# Altium PCB PekeeCarte1.PcbDoc
Units mil, origin at the board's own origin, x right, y up, seen from the top; angles counter-clockwise.
Board outline 2330.03 x 1470.03 mil, 2 copper layers (Top Layer, Bottom Layer); 8 components, 12 nets, 116 pads, 0 vias.
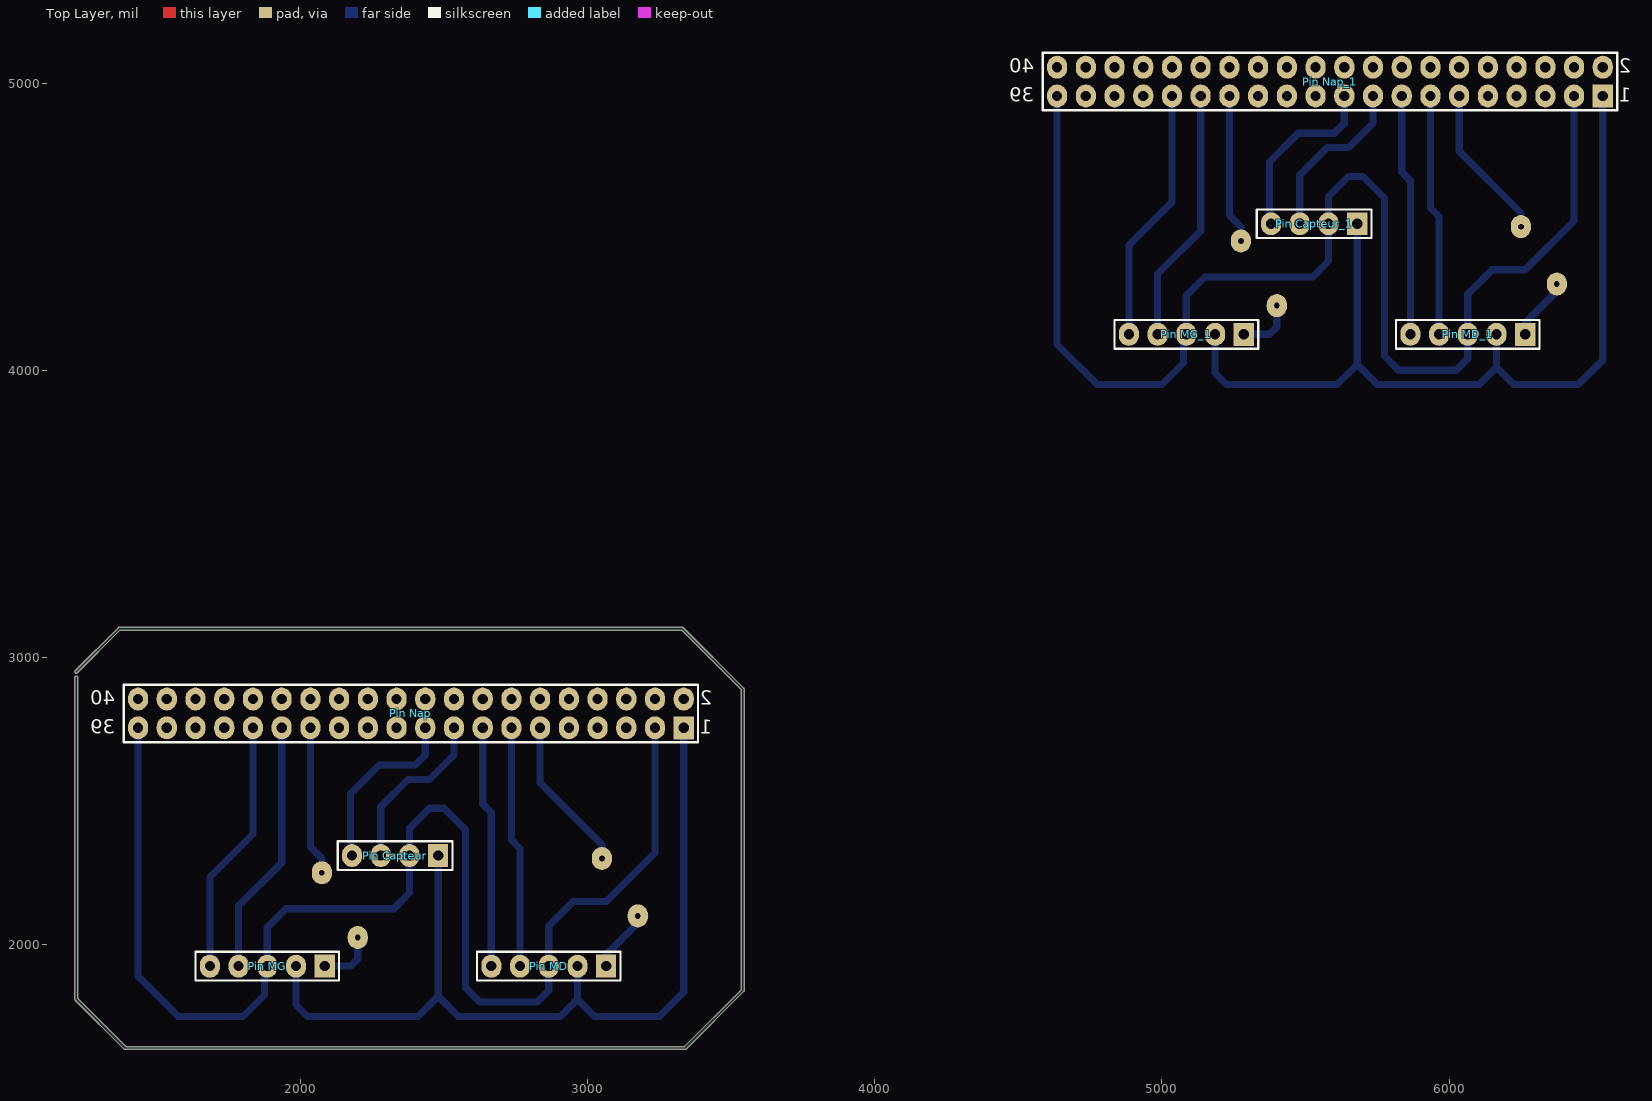
[diagram p0: Top Layer view]
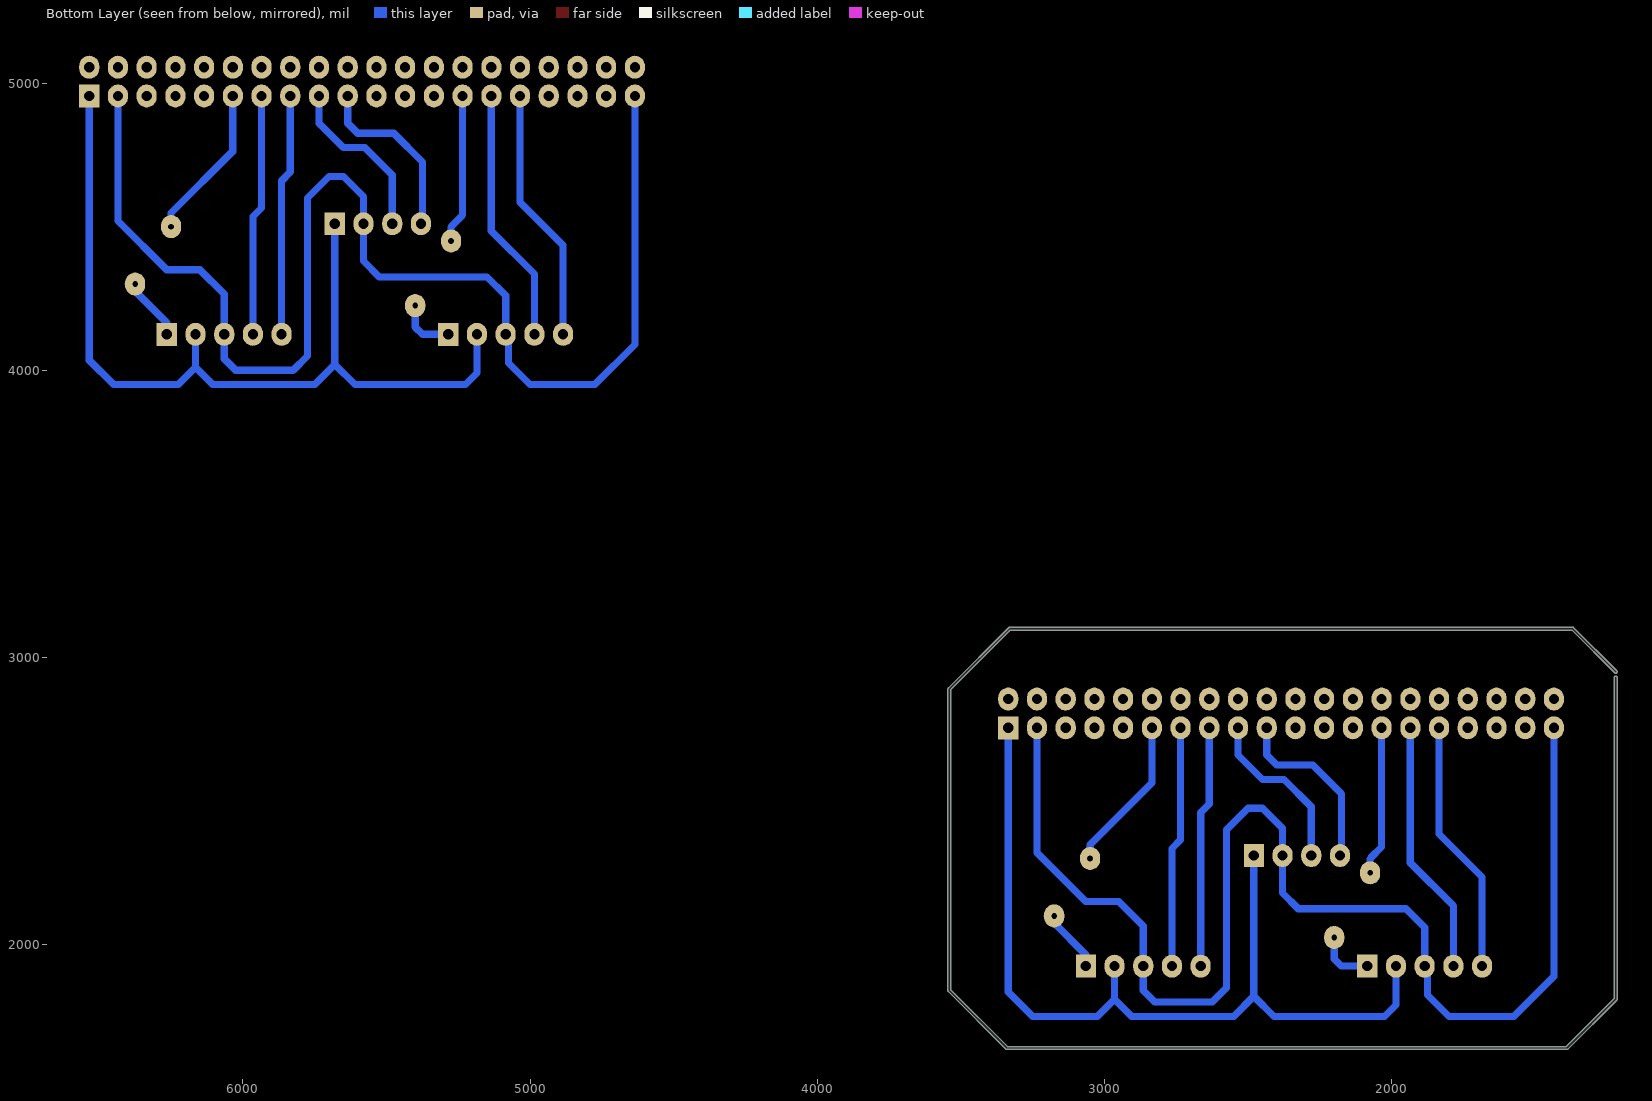
[diagram p1: Bottom Layer view, seen from below]

## Layer stack, top to bottom
Top Solder: solder mask 0.4, Solder Resist, Dk 3.5
Top Layer: signal copper 1.4
Dielectric 1: dielectric 12.6, FR-4, Dk 4.8
Bottom Layer: signal copper 1.4
Bottom Solder: solder mask 0.4, Solder Resist, Dk 3.5

## Board outline
1216.47,1806.44 cw(c1220,1810) 1214.98,1810 1214.98,2930 cw(c1220,2930) 1225.02,2930 1225.02,1812.08 1392.08,1645.02 3337.92,1645.02 3534.99,1842.08 3534.99,2887.92 3327.92,3094.99 1372.08,3094.99 1223.55,2946.45 cw(c1220,2950) 1216.45,2953.55 1366.45,3103.55 1366.44,3103.53 cw(c1370,3100) 1370,3105.01 3330,3105.01 cw(c3330,3100) 3333.56,3103.53 3333.55,3103.55 3543.55,2893.55 3543.53,2893.56 cw(c3540,2890) 3545.01,2890 3545.01,1840 cw(c3540,1840) 3543.53,1836.44 3543.55,1836.45 3343.55,1636.45 3343.56,1636.47 cw(c3340,1640) 3340,1634.98 1390,1634.98 cw(c1390,1640) 1386.44,1636.47 1386.45,1636.45

## Design rules (kind name [scope] priority, off if disabled: settings)
AssemblyTestPointUsage [All] p1 off:
AssemblyTestpoint [All] p1 off: testpointundercomponent=TRUE minsize=40 maxsize=100 preferedsize=60 minholesize=0 maxholesize=40 preferedholesize=32 testpointgrid=1 usegrid=TRUE gridtolerance=0.01 allowsidetop=TRUE allowsidebottom=TRUE
Clearance [All] p1 off: gap=10
ComponentClearance [All] p1 off: gap=10 collisioncheckmode=3 verticalgap=10 showdistances=FALSE
DiffPairsRouting [All] p1 off: maxlimit=10 minlimit=10 mostfreqgap=10 toplayer_minwidth=15 toplayer_maxwidth=15 toplayer_prefwidth=15 bottomlayer_minwidth=15 bottomlayer_maxwidth=15 bottomlayer_prefwidth=15 maxuncoupledlength=500
FabricationTestPointUsage [All] p1 off: valid=0 allowmultiple=FALSE
FabricationTestpoint [All] p1 off: side=3 testpointundercomponent=TRUE minsize=40 maxsize=100 preferedsize=60 minholesize=0 maxholesize=40 preferedholesize=32 testpointgrid=1 allowsidetop=TRUE allowsidebottom=TRUE usegrid=TRUE gridtolerance=0.01
FanoutControl Fanout_BGA [IsBGA] p1 off: bgadir=Out bgaviamode=Centered fanoutstyle=Auto fanoutdirection=Alternating viagrid=1 // Fanout_BGA (Default Rule)
FanoutControl Fanout_LCC [IsLCC] p2 off: bgadir=Out bgaviamode=Centered fanoutstyle=Auto fanoutdirection=Alternating viagrid=1 // Fanout_LCC (Default Rule)
FanoutControl Fanout_SOIC [IsSOIC] p3 off: bgadir=Out bgaviamode=Centered fanoutstyle=Auto fanoutdirection=Alternating viagrid=1 // Fanout_SOIC (Default Rule)
FanoutControl Fanout_Small [(CompPinCount < 5)] p4 off: bgadir=Out bgaviamode=Centered fanoutstyle=Auto fanoutdirection=OutThenIn viagrid=1 // Fanout_Small (Default Rule)
FanoutControl Fanout_Default [All] p5 off: bgadir=Out bgaviamode=Centered fanoutstyle=Auto fanoutdirection=Alternating viagrid=1 // Fanout_Default (Default Rule)
Height [All] p1 off: minheight=0 maxheight=1000 prefheight=500
HoleSize [All] p1 off: absolutevalues=TRUE maxlimit=100 minlimit=1 maxpercent=80.000 minpercent=20.000
HoleToHoleClearance [All] p1 off: gap=10 allowstackedmicrovias=TRUE
LayerPairs [All] p1 off: enforce=TRUE
MinimumSolderMaskSliver [All] p1 off: minsoldermaskwidth=10
NetAntennae [All] p1 off: netantennaetolerance=0
PasteMaskExpansion [All] p1 off: expansion=0
PlaneClearance [All] p1 off: clearance=20
PlaneConnect [All] p1 off: planeconnectstyle=Relief reliefexpansion=20 reliefentries=4 reliefconductorwidth=10 reliefairgap=10
PolygonConnect [All] p1 off: connectstyle=Relief reliefconductorwidth=10 reliefentries=4 polygonreliefangle="90 Angle" airgapwidth=10
RoutingCorners [All] p1 off: cornerstyle=45-Degree minsetback=100 maxsetback=100
RoutingLayers [All] p1 off: top layer_v5=TRUE bottom layer_v5=TRUE
RoutingPriority [All] p1 off: routingpriority=0
RoutingTopology [All] p1 off: topology=Shortest
RoutingVias [All] p1 off: holewidth=28 width=50 viastyle="Through Hole" minholewidth=28 minwidth=50 maxholewidth=28 maxwidth=50
ShortCircuit [All] p1 off: allowed=FALSE
SilkToBoardRegionClearance [All] p1 off:
SilkToSilkClearance [All] p1 off: silktosilkclearance=10
SilkToSolderMaskClearance [IsPad] p1 off: minsilkscreentomaskgap=10 clearancetoexposedcopper=TRUE
SolderMaskExpansion [All] p1 off: expansion=4
UnRoutedNet [All] p1 off:
Width [All] p1 off: maxlimit=25 minlimit=10 preferedwidth=25 minimp=50.000000 maximp=50.000000 favimp=50.000000

## Classes and differential pairs
component class PekeeCarte1: "Pin Capteur" "Pin MD" "Pin MG" "Pin Nap"

## Components (designator, comment, footprint, x,y, rotation, side; value= is the part's Value field where it differs from the comment)
"Pin Capteur" "Header 4" HDR1X4 2480,2310 r180 top
"Pin Capteur_1" "Header 4" HDR1X4 5680,4510 r180 top (schematic designator "Pin Capteur")
"Pin MD" "Header 5" HDR1X5 3065,1925 r180 top
"Pin MD_1" "Header 5" HDR1X5 6265,4125 r180 top (schematic designator "Pin MD")
"Pin MG" "Header 5" HDR1X5 2085,1925 r180 top
"Pin MG_1" "Header 5" HDR1X5 5285,4125 r180 top (schematic designator "Pin MG")
"Pin Nap" "Header 20X2" HDR2X20 3335,2755 r180 top
"Pin Nap_1" "Header 20X2" HDR2X20 6535,4955 r180 top (schematic designator "Pin Nap")

## Footprints (in the part's own frame and the unit in brackets; to place one, negate y for a bottom-side part, rotate by r counter-clockwise, add the part's x,y. Pads: shape width x height; smd on the part's side, far side on the other; paste and mask are expansions set on the pad)
HDR1X4 [mil] "Connector; Header; 4 Position"
  rect 70x80 hole 35.43: 1(0,0)
  oval 70x80 hole 35.43: 2(100,0) 3(200,0) 4(300,0)
  silkscreen extent -50,-50 350,50
HDR1X5 [mil] "Connector; Header; 5 Position"
  rect 70x80 hole 35.43: 1(0,0)
  oval 70x80 hole 35.43: 2(100,0) 3(200,0) 4(300,0) 5(400,0)
  silkscreen extent -50,-50 450,50
HDR2X20 [mil] "Connector; Header; 20x2 Position"
  rect 70x80 hole 35.43: 1(0,0)
  oval 70x80 hole 35.43: 2(0,-100) 3(100,0) 4(100,-100) 5(200,0) 6(200,-100) 7(300,0) 8(300,-100) 9(400,0) 10(400,-100) 11(500,0) 12(500,-100) 13(600,0) 14(600,-100) 15(700,0) 16(700,-100) 17(800,0) 18(800,-100) 19(900,0) 20(900,-100) 21(1000,0) 22(1000,-100) 23(1100,0) 24(1100,-100) 25(1200,0) 26(1200,-100) 27(1300,0) 28(1300,-100) 29(1400,0) 30(1400,-100) 31(1500,0) 32(1500,-100) 33(1600,0) 34(1600,-100) 35(1700,0) 36(1700,-100) 37(1800,0) 38(1800,-100) 39(1900,0) 40(1900,-100)
  silkscreen extent -50,-150 1950,50

## Part data
"Pin Capteur" "Pin Capteur_1": "Header, 4-Pin"
"Pin MD" "Pin MD_1" "Pin MG" "Pin MG_1": "Header, 5-Pin"
"Pin Nap" "Pin Nap_1": "Header, 20-Pin, Dual row"

## Free pads (board coordinates)
  oval 70x80 hole 20: 0(3175,2100) 0(6375,4300) 1(2075,2250) 1(2200,2025) 1(3050,2300) 1(5275,4450) 1(5400,4225) 1(6250,4500)

## Nets (pads, with @x,y where several pads share a name; then routed paths per layer and width w, separated by ;. In a path a pad name is that pad's centre, name@x,y a point inside that pad or via, vN(x,y) a via of type N, cw(c..) or ccw(c..) an arc to the next point about the centre after c; other vN are vias at no path point)
+5V: "Pin Capteur.1" "Pin MD.2" "Pin MG.2" "Pin Nap.1" | length 3169.5
  Bottom Layer w25: 1985,1925 1985,1790 2025,1750 2410,1750 2480,1820 ; 2480,2310 2480,1820 ; 2965,1925 2965,1810 ; 3335,2755 3335,1835 3250,1750 3025,1750 2965,1810 ; 2480,1820 2550,1750 2905,1750 2965,1810
"NetPin Capteur_2": "Pin Capteur.2" "Pin MD.3" "Pin MG.3" "Pin Nap.3" "Pin Nap.39" | length 4670.9
  Bottom Layer w25: 1435,2755 1435,1890 1575,1750 1800,1750 1875,1825 1875,1915 1885,1925 1885,2060 1950,2125 2085,2125 2325,2125 2380,2180 2380,2310 2380,2405 2450,2475 2500,2475 2575,2400 2575,1850 2625,1800 2825,1800 2865,1840 2865,1925 2865,2065 2950,2150 3065,2150 3235,2320 3235,2755
"NetPin Capteur_3": "Pin Capteur.3" "Pin Nap.17" | length 594.6
  Bottom Layer w25: 2280,2310 2280,2480 2375,2575 2450,2575 2535,2660 2535,2755
"NetPin Capteur_4": "Pin Capteur.4" "Pin Nap.19" | length 620.9
  Bottom Layer w25: 2175,2315 2175,2525 2275,2625 2400,2625 2435,2660 2435,2755
"NetPin MD_4": "Pin MD.4" "Pin Nap.13" | length 842.4
  Bottom Layer w25: 2735,2755 2735,2365 2765,2335 2765,1925
"NetPin MD_5": "Pin MD.5" "Pin Nap.15" | length 842.4
  Bottom Layer w25: 2635,2755 2635,2490 2665,2460 2665,1925
"NetPin MG_4": "Pin MG.4" "Pin Nap.29" | length 892.1
  Bottom Layer w25: 1785,1925 1785,2135 1935,2285 1935,2755
"NetPin MG_5": "Pin MG.5" "Pin Nap.31" | length 892.1
  Bottom Layer w25: 1685,1925 1685,2235 1835,2385 1835,2755
"PIN1 MD": "Pin Nap.11" | length 544.1
  Bottom Layer w25: 2835,2755 2835,2562.5 3050,2347.5 3050,2300
"PIN1 MG": "Pin Nap.27" | length 521.6
  Bottom Layer w25: 2035,2755 2035,2340 2072.5,2302.5 2072.5,2300 2075,2297.5 2075,2250
PIN11: "Pin MD.1" | length 280.9
  Bottom Layer w25: 3065,1925 3065,1965 3175,2075 ; 3175,2075 3200,2100 3175,2100 3175,2075
PIN27: "Pin MG.1" | length 200.4
  Bottom Layer w25: 2085,1925 2175,1925 2200,1950 2200,2025
pads on no net: "Pin Capteur_1.1" "Pin Capteur_1.2" "Pin Capteur_1.3" "Pin Capteur_1.4" "Pin MD_1.1" "Pin MD_1.2" "Pin MD_1.3" "Pin MD_1.4" "Pin MD_1.5" "Pin MG_1.1" "Pin MG_1.2" "Pin MG_1.3" "Pin MG_1.4" "Pin MG_1.5" "Pin Nap.2" "Pin Nap.4" "Pin Nap.5" "Pin Nap.6" "Pin Nap.7" "Pin Nap.8" "Pin Nap.9" "Pin Nap.10" "Pin Nap.12" "Pin Nap.14" "Pin Nap.16" "Pin Nap.18" "Pin Nap.20" "Pin Nap.21" "Pin Nap.22" "Pin Nap.23" "Pin Nap.24" "Pin Nap.25" "Pin Nap.26" "Pin Nap.28" "Pin Nap.30" "Pin Nap.32" "Pin Nap.33" "Pin Nap.34" "Pin Nap.35" "Pin Nap.36" "Pin Nap.37" "Pin Nap.38" "Pin Nap.40" "Pin Nap_1.1" "Pin Nap_1.2" "Pin Nap_1.3" "Pin Nap_1.4" "Pin Nap_1.5" "Pin Nap_1.6" "Pin Nap_1.7" "Pin Nap_1.8" "Pin Nap_1.9" "Pin Nap_1.10" "Pin Nap_1.11" "Pin Nap_1.12" "Pin Nap_1.13" "Pin Nap_1.14" "Pin Nap_1.15" "Pin Nap_1.16" "Pin Nap_1.17" "Pin Nap_1.18" "Pin Nap_1.19" "Pin Nap_1.20" "Pin Nap_1.21" "Pin Nap_1.22" "Pin Nap_1.23" "Pin Nap_1.24" "Pin Nap_1.25" "Pin Nap_1.26" "Pin Nap_1.27" "Pin Nap_1.28" "Pin Nap_1.29" "Pin Nap_1.30" "Pin Nap_1.31" "Pin Nap_1.32" "Pin Nap_1.33" "Pin Nap_1.34" "Pin Nap_1.35" "Pin Nap_1.36" "Pin Nap_1.37" "Pin Nap_1.38" "Pin Nap_1.39" "Pin Nap_1.40"
copper on no net: | length 14071.8
  Bottom Layer w25: 4635,4955 4635,4090 4775,3950 5000,3950 5075,4025 5075,4115 5085,4125 5085,4260 5150,4325 5285,4325 5525,4325 5580,4380 5580,4510 5580,4605 5650,4675 5700,4675 5775,4600 5775,4050 5825,4000 6025,4000 6065,4040 6065,4125 6065,4265 6150,4350 6265,4350 6435,4520 6435,4955 ; 4885,4125 4885,4435 5035,4585 5035,4955 ; 4985,4125 4985,4335 5135,4485 5135,4955 ; 5185,4125 5185,3990 5225,3950 5610,3950 5680,4020 ; 5235,4955 5235,4540 5272.5,4502.5 5272.5,4500 5275,4497.5 5275,4450 ; 5285,4125 5375,4125 5400,4150 5400,4225 ; 5375,4515 5375,4725 5475,4825 5600,4825 5635,4860 5635,4955 ; 5480,4510 5480,4680 5575,4775 5650,4775 5735,4860 5735,4955 ; 5680,4510 5680,4020 ; 5835,4955 5835,4690 5865,4660 5865,4125 ; 5935,4955 5935,4565 5965,4535 5965,4125 ; 6035,4955 6035,4762.5 6250,4547.5 6250,4500 ; 6165,4125 6165,4010 ; 6265,4125 6265,4165 6375,4275 ; 6535,4955 6535,4035 6450,3950 6225,3950 6165,4010 ; 5680,4020 5750,3950 6105,3950 6165,4010 ; 6375,4275 6375,4300 6400,4300 6375,4275

## Silkscreen, mask and mechanical layers (free items; w line width, h text height)
Mechanical 1:
  lines w10: 1220,2940 1220,2930 ; 4420,5140 4420,5130 ; 1220,2930 1220,1810 1390,1640 3340,1640 3540,1840 3540,2890 3330,3100 1370,3100 1220,2950 1220,2930 ; 4420,5130 4420,5150 4570,5300 6530,5300 6740,5090 6740,4040 6540,3840 4590,3840 4420,4010 4420,5130

## Text inside footprints (layer, text, board x,y; h text height)
"Pin Nap": Top Overlay "39" at 1355,2735 h50; Top Overlay "40" at 1355,2835 h50; Top Overlay "2" at 3435,2835 h50; Top Overlay "1" at 3435,2735 h50
"Pin Nap_1": Top Overlay "39" at 4555,4935 h50; Top Overlay "40" at 4555,5035 h50; Top Overlay "2" at 6635,5035 h50; Top Overlay "1" at 6635,4935 h50